# Altium PCB EEG_Electrodes.PcbDoc
Units mil, origin at the board's own origin, x right, y up, seen from the top; angles counter-clockwise.
Board outline 5072.94 x 5237.85 mil, 2 copper layers (Top Layer, Bottom Layer), stack 10.984 mil thick; 57 components, 50 nets, 162 pads, 0 vias.
Unrouted connection lines stored in the file: 96.
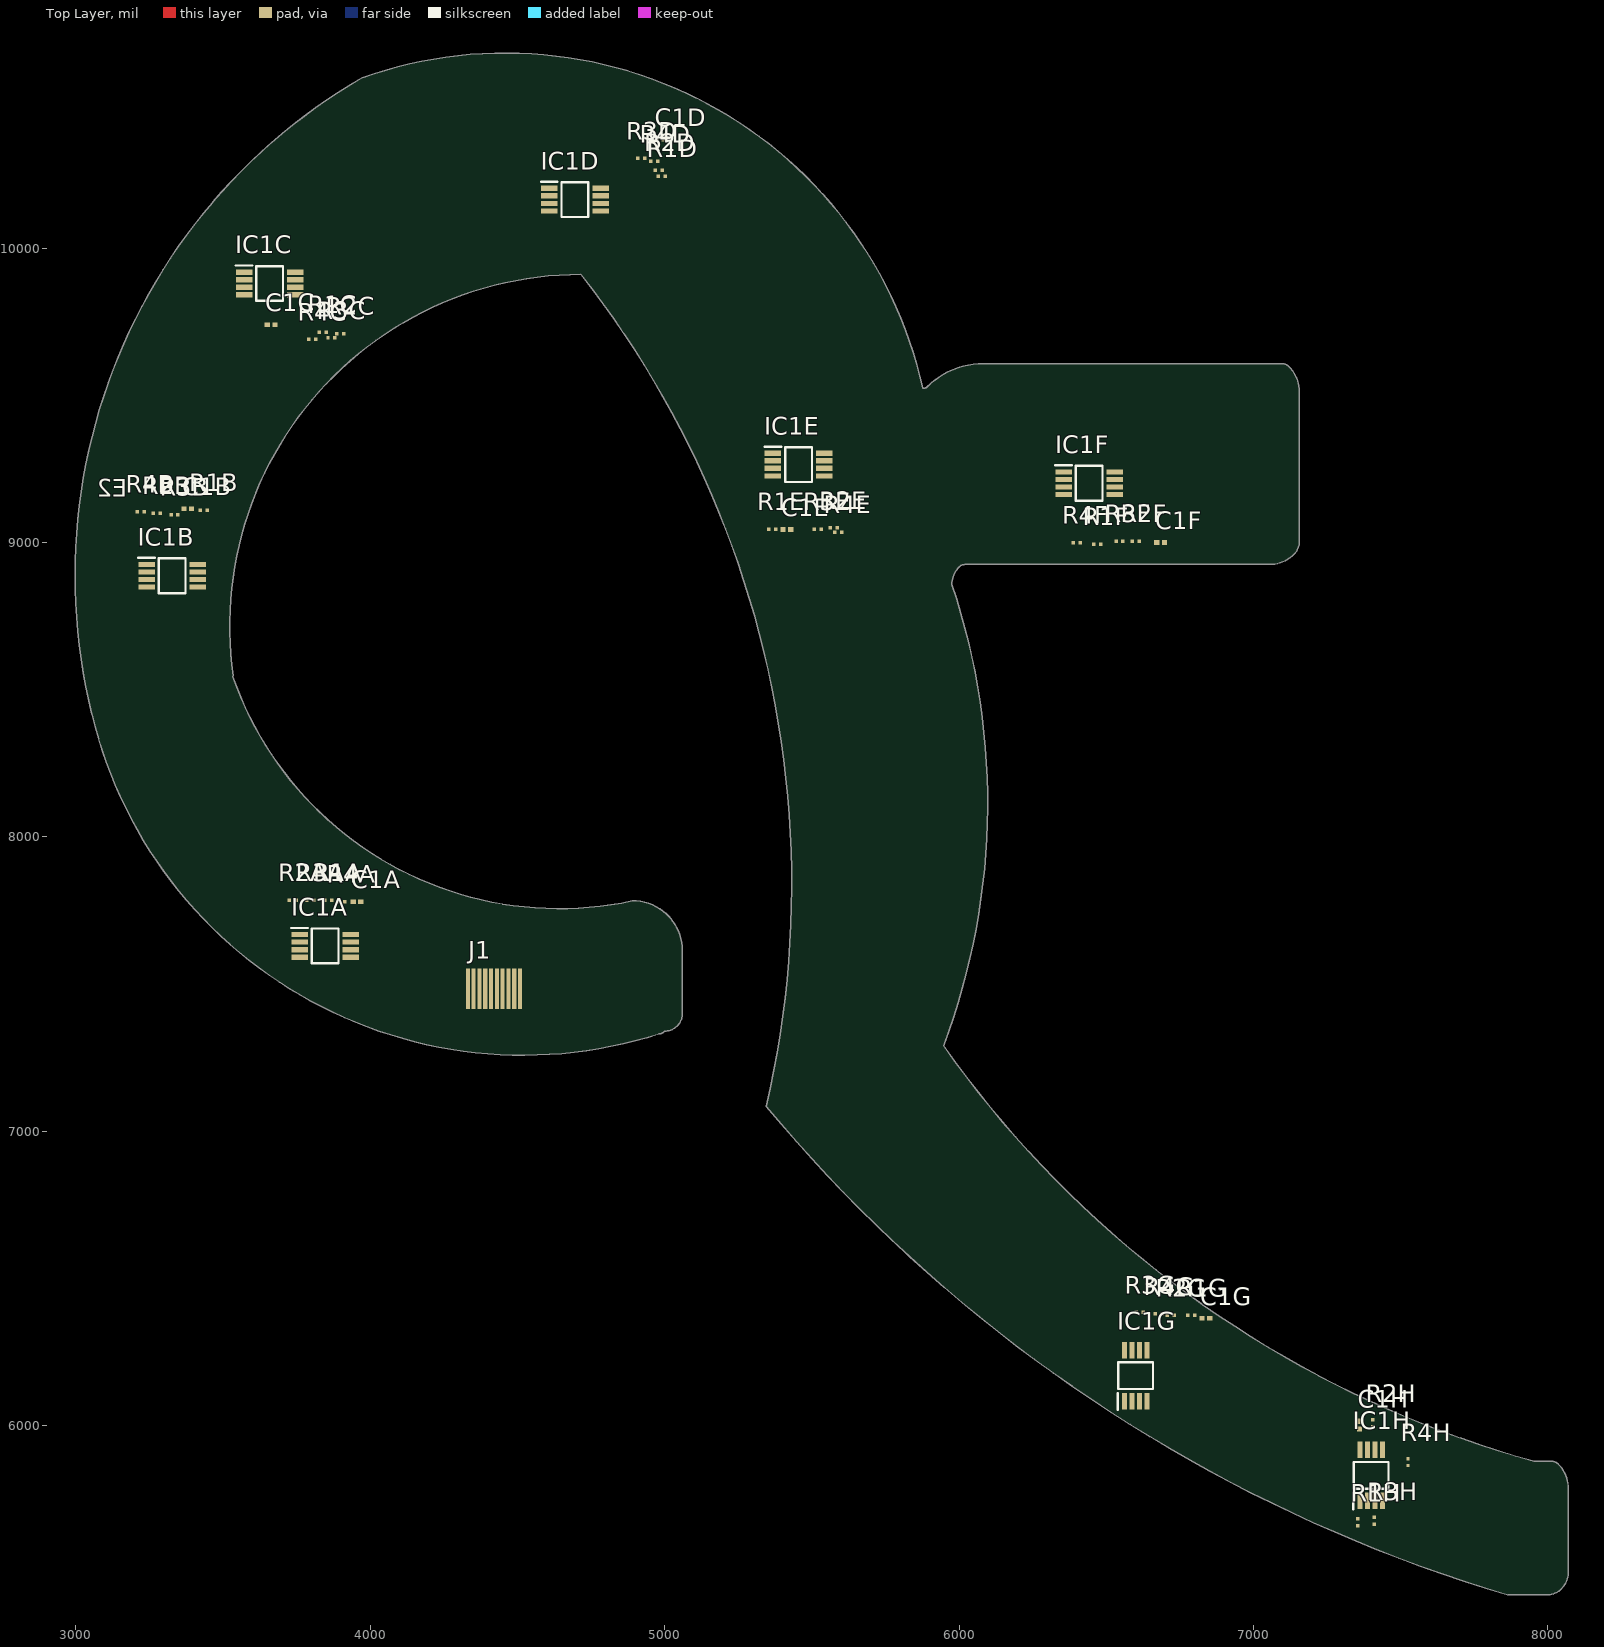
[diagram p0: Top Layer view]
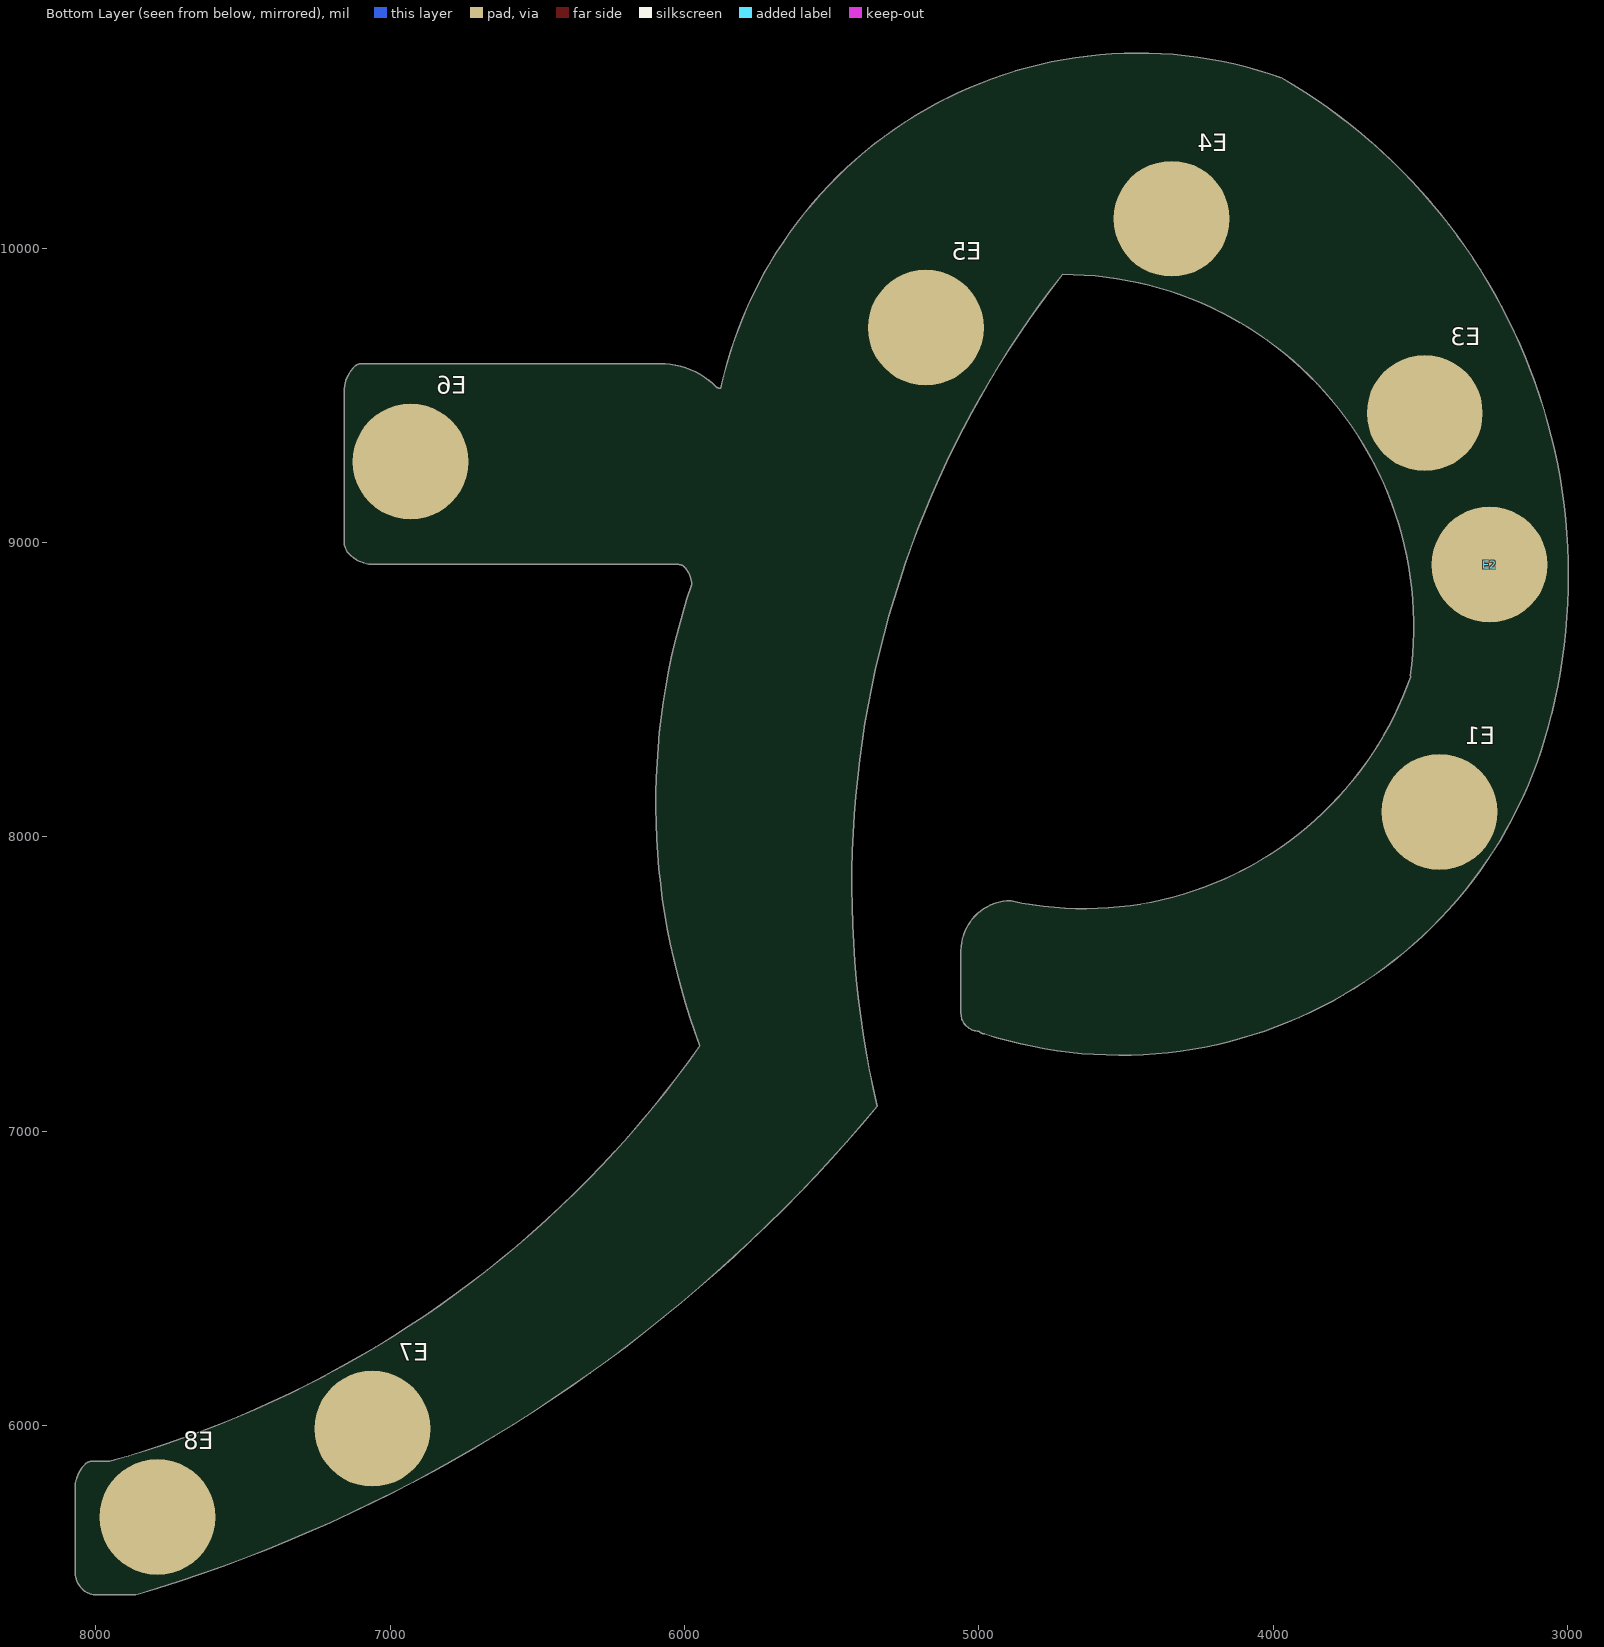
[diagram p1: Bottom Layer view, seen from below]

## Layer stack, top to bottom
Top Stiffener: core 3.937, Core-009, Dk 4.5
Top PI Coverlay: solder mask 0.4921, FC-001, Dk 4
Adhesive 3: prepreg 0.5906, PP-006, Dk 4.1
Top Layer: signal copper 0.4724
Polyimide: core 0.9843, Core-009, Dk 4.5
Bottom Layer: signal copper 0.4724
Adhesive 1: prepreg 0.5906, PP-006, Dk 4.1
Bottom PI Coverlay: solder mask 0.4921, FC-001, Dk 4
Bottom Stifener: core 3.937, Core-009, Dk 4.5

## Board outline
4979.75,7330.78 ccw(c4979.75,7356.18) 4997.71,7338.22 5000,7340.51 ccw(c5000,7401.09) 5060.58,7401.09 5060.58,7613.39 ccw(c4890,7613.39) 4890,7783.97 4890.29,7782.65 cw(c4642.7,8931.44) 3533.11,8544.34 3534.73,8547.8 cw(c4715.58,8717.84) 4715.58,9910.88 cw(c2075.71,7839.18) 5345.48,7084.57 ccw(c9341.39,10408.76) 7864.52,5425.14 7997.05,5425.14 ccw(c7997.05,5492.95) 8045,5445 ccw(c7984.64,5505.36) 8070,5505.36 8070,5785 ccw(c7949.29,5785) 8034.64,5870.36 ccw(c8013.53,5849.24) 8013.53,5879.1 7952.74,5879.1 cw(c8925.5,9391.03) 5947.32,7290.95 ccw(c3760.23,8114.1) 5975.58,8857.84 cw(c6060.08,8857.84) 6000.33,8917.59 cw(c6019.68,8898.24) 6019.68,8925.61 7053.35,8925.61 ccw(c7053.35,9046.32) 7138.7,8960.96 ccw(c7097.95,9001.71) 7155.58,9001.71 7155.58,9512.84 ccw(c7034.87,9512.84) 7120.22,9598.2 ccw(c7096.94,9574.91) 7096.94,9607.84 6083.72,9607.84 ccw(c6083.72,9334.71) 5890.58,9527.84 cw(c5883.2,9535.22) 5883.2,9524.79 5876.79,9524.79 ccw(c4458.79,9210.61) 3973.82,10579.64 ccw(c4950.58,8887.84) 3054.51,8417.6 3055.13,8415.09 ccw(c4519.61,8764.27)

## Design rules (kind name [scope] priority, off if disabled: settings)
BoardOutlineClearance [All] p1: gap=7.87 ignorepadtopadclearanceinfootprint=FALSE
Clearance [All] p1: gap=5 ignorepadtopadclearanceinfootprint=FALSE except(9.84: Arc-Hole Track-Hole SMDPad-Hole THPad-Hole Via-Hole Fill-Hole Poly-Hole Region-Hole Text-Hole)
ComponentClearance [All] p1: gap=5 collisioncheckmode=3 verticalgap=5 showdistances=TRUE
DiffPairsRouting [All] p1: maxlimit=10 minlimit=5 mostfreqgap=5 toplayer_minwidth=5 toplayer_maxwidth=1000 toplayer_prefwidth=5 bottomlayer_minwidth=5 bottomlayer_maxwidth=1000 bottomlayer_prefwidth=5 substack1={4B11E26E-8A27-4325-B018-70703EFA4E52} toplayer_{4b11e26e-8a27-4325-b018-70703efa4e52}_minwidth=15 toplayer_{4b11e26e-8a27-4325-b018-70703efa4e52}_maxwidth=15 toplayer_{4b11e26e-8a27-4325-b018-70703efa4e52}_prefwidth=15 bottomlayer_{4b11e26e-8a27-4325-b018-70703efa4e52}_minwidth=15 bottomlayer_{4b11e26e-8a27-4325-b018-70703efa4e52}_maxwidth=15 bottomlayer_{4b11e26e-8a27-4325-b018-70703efa4e52}_prefwidth=15 substack2={89878998-361B-46A6-8B36-161A69BB316E} toplayer_{89878998-361b-46a6-8b36-161a69bb316e}_minwidth=15 toplayer_{89878998-361b-46a6-8b36-161a69bb316e}_maxwidth=15 toplayer_{89878998-361b-46a6-8b36-161a69bb316e}_prefwidth=15 bottomlayer_{89878998-361b-46a6-8b36-161a69bb316e}_minwidth=15 bottomlayer_{89878998-361b-46a6-8b36-161a69bb316e}_maxwidth=15 bottomlayer_{89878998-361b-46a6-8b36-161a69bb316e}_prefwidth=15 substack3={C0E35EA4-88D3-436C-B866-F59DB42A6E85} toplayer_{c0e35ea4-88d3-436c-b866-f59db42a6e85}_minwidth=15 toplayer_{c0e35ea4-88d3-436c-b866-f59db42a6e85}_maxwidth=15 toplayer_{c0e35ea4-88d3-436c-b866-f59db42a6e85}_prefwidth=15 bottomlayer_{c0e35ea4-88d3-436c-b866-f59db42a6e85}_minwidth=15 bottomlayer_{c0e35ea4-88d3-436c-b866-f59db42a6e85}_maxwidth=15 bottomlayer_{c0e35ea4-88d3-436c-b866-f59db42a6e85}_prefwidth=15 maxuncoupledlength=500
Height [All] p1: minheight=0 maxheight=71497.94 prefheight=500
HoleSize [All] p1: absolutevalues=TRUE maxlimit=248.03 minlimit=11.81 maxpercent=80.000 minpercent=20.000
HoleToHoleClearance [All] p1: gap=9.84 allowstackedmicrovias=FALSE
MinimumAnnularRing [All] p1: minimumring=3
MinimumSolderMaskSliver [All] p1: minsoldermaskwidth=0
PlaneClearance [All] p1: clearance=5
PlaneConnect PlaneConnectPowerPads [InPadClass('PowerPads')] p1: planeconnectstyle=Direct reliefexpansion=20 reliefentries=4 reliefconductorwidth=10 reliefairgap=10
PlaneConnect [All] p2: pad.planeconnectstyle=Relief pad.reliefexpansion=11.81 pad.reliefentries=4 pad.reliefconductorwidth=5 pad.reliefairgap=5 via.planeconnectstyle=Direct via.reliefexpansion=11.81 via.reliefentries=4 via.reliefconductorwidth=5 via.reliefairgap=5
PolygonConnect PolygonConnectPowerPads [All vs (InPadClass('PowerPads'))] p1: connectstyle=Direct reliefconductorwidth=10 reliefentries=4 polygonreliefangle="90 Angle" airgapwidth=10
PolygonConnect [All] p2: thpad.connectstyle=Relief thpad.reliefconductorwidth=5 thpad.reliefentries=4 thpad.polygonreliefangle="90 Angle" thpad.airgapwidth=5 smdpad.connectstyle=Relief smdpad.reliefconductorwidth=5 smdpad.reliefentries=4 smdpad.polygonreliefangle="90 Angle" smdpad.airgapwidth=5 via.connectstyle=Direct via.reliefconductorwidth=5 via.reliefentries=4 via.polygonreliefangle="90 Angle" via.airgapwidth=5
RoomDefinition Designator1 [InComponentClass('Designator1')] p1: confinementstyle=ConfineIn formatcopy=TRUE lockcomponents=FALSE outline 3536.81,7550 3981.81,7550 3981.81,7850 3536.81,7850
RoomDefinition Designator7 [InComponentClass('Designator7')] p2: confinementstyle=ConfineIn formatcopy=TRUE lockcomponents=FALSE outline 6520,6035 7125,6035 7125,6485 6520,6485
RoomDefinition Designator6 [InComponentClass('Designator6')] p3: confinementstyle=ConfineIn formatcopy=TRUE lockcomponents=FALSE outline 6310,8945 7035,8945 7035,9280 6310,9280
RoomDefinition Designator2 [InComponentClass('Designator2')] p4: confinementstyle=ConfineIn formatcopy=TRUE lockcomponents=FALSE outline 3150,8810 3485,8810 3485,9150 3150,9150
RoomDefinition Designator3 [InComponentClass('Designator3')] p5: confinementstyle=ConfineIn formatcopy=TRUE lockcomponents=FALSE outline 3523.19,9615 4058.19,9615 4058.19,9960 3523.19,9960
RoomDefinition Designator4 [InComponentClass('Designator4')] p6: confinementstyle=ConfineIn formatcopy=TRUE lockcomponents=FALSE outline 4560,10085 5040,10085 5040,10395 4560,10395
RoomDefinition Designator5 [InComponentClass('Designator5')] p7: confinementstyle=ConfineIn formatcopy=TRUE lockcomponents=FALSE outline 5295,8995 5640,8995 5640,9345 5295,9345
RoomDefinition Designator8 [InComponentClass('Designator8')] p8: confinementstyle=ConfineIn formatcopy=TRUE lockcomponents=FALSE outline 7311.61,5604.72 7566.61,5604.72 7566.61,6054.72 7311.61,6054.72
RoutingVias [All] p1: holewidth=11.81 width=23.62 viastyle="Through Hole" minholewidth=11.81 minwidth=23.62 maxholewidth=23.62 maxwidth=259.84
SilkToSilkClearance [All] p1: silktosilkclearance=0
SilkToSolderMaskClearance [IsPad] p1: minsilkscreentomaskgap=5 clearancetoexposedcopper=TRUE
SolderMaskExpansion [All] p1: expansion=2.95 istentingtop=FALSE
SupplyNets "Schematic Supply Nets_1" [InNet('VCC')] p1: voltage=0.000
SupplyNets "Schematic Supply Nets" [InNet('GND')] p2: voltage=0.000
Width [All] p1: maxlimit=1000 minlimit=5 preferedwidth=5 substack1={4B11E26E-8A27-4325-B018-70703EFA4E52} substack2={89878998-361B-46A6-8B36-161A69BB316E} substack3={C0E35EA4-88D3-436C-B866-F59DB42A6E85} minimp=50.000000 maximp=50.000000 favimp=50.000000
20 further rules are at their usual default settings.

## Classes and differential pairs
channel class Electrode: Designator1 Designator2 Designator3 Designator4 Designator5 Designator6 Designator7 Designator8
component class Designator8: C1H IC1H R1H R2H R3H R4H
component class Designator7: C1G IC1G R1G R2G R3G R4G
component class Designator6: C1F IC1F R1F R2F R3F R4F
component class Designator5: C1E IC1E R1E R2E R3E R4E
component class Designator4: C1D IC1D R1D R2D R3D R4D
component class Designator3: C1C IC1C R1C R2C R3C R4C
component class Designator2: C1B IC1B R1B R2B R3B R4B
component class Designator1: C1A IC1A R1A R2A R3A R4A
component class EEG_Electrodes: E1 E2 E3 E4 E5 E6 E7 E8 J1

## Components (designator, comment, footprint, x,y, rotation, side; value= is the part's Value field where it differs from the comment)
C1A "GRM033R6YA104KE14D" CAPC0603X33N 3954.8,7780 r0 top (schematic designator C1)
C1B "GRM033R6YA104KE14D" CAPC0603X33N 3380,9115 r0 top (schematic designator C1)
C1C "GRM033R6YA104KE14D" CAPC0603X33N 3663.19,9740 r0 top (schematic designator C1)
C1D "GRM033R6YA104KE14D" CAPC0603X33N 4985,10370 r0 top (schematic designator C1)
C1E "GRM033R6YA104KE14D" CAPC0603X33N 5415,9045 r0 top (schematic designator C1)
C1F "GRM033R6YA104KE14D" CAPC0603X33N 6685,9000 r0 top (schematic designator C1)
C1G "GRM033R6YA104KE14D" CAPC0603X33N 6838.46,6365 r0 top (schematic designator C1)
C1H "GRM033R6YA104KE14D" CAPC0603X33N 7360,6001.81 r90 top (schematic designator C1)
E1 "EEG_Electrode" EEG_Electrode#1 3435,8085 r0 top
E2 "EEG_Electrode" EEG_Electrode#2 3265,8925 r180 bottom
E3 "EEG_Electrode" EEG_Electrode#1 3485,9440 r0 top
E4 "EEG_Electrode" EEG_Electrode#1 4345,10100 r0 top
E5 "EEG_Electrode" EEG_Electrode#1 5180,9730 r0 top
E6 "EEG_Electrode" EEG_Electrode#1 6930,9275 r0 top
E7 "EEG_Electrode" EEG_Electrode#1 7060,5990 r0 top
E8 "EEG_Electrode" EEG_Electrode#1 7790,5690 r0 top
IC1A "LTC6078ACMS8#TRPBF" SOP65P490X110-8N 3846.81,7630 r0 top (schematic designator IC1)
IC1B "LTC6078ACMS8#TRPBF" SOP65P490X110-8N 3327.09,8887.2 r0 top (schematic designator IC1)
IC1C "LTC6078ACMS8#TRPBF" SOP65P490X110-8N 3658.19,9880 r0 top (schematic designator IC1)
IC1D "LTC6078ACMS8#TRPBF" SOP65P490X110-8N 4695,10165 r0 top (schematic designator IC1)
IC1E "LTC6078ACMS8#TRPBF" SOP65P490X110-8N 5455,9265 r0 top (schematic designator IC1)
IC1F "LTC6078ACMS8#TRPBF" SOP65P490X110-8N 6442.09,9201.61 r0 top (schematic designator IC1)
IC1G "LTC6078ACMS8#TRPBF" SOP65P490X110-8N 6600,6170 r90 top (schematic designator IC1)
IC1H "LTC6078ACMS8#TRPBF" SOP65P490X110-8N 7400,5831.81 r90 top (schematic designator IC1)
J1 "10FHH-SM1-GAN-TF FPC" "10FHH-SM1-GAN-TF FPC" 4331.57,7416.1 r0 top
R1A "ERA-1AEB101C" ERA1A_(0201) 3856.81,7785 r0 top (schematic designator R1)
R1B "ERA-1AEB101C" ERA1A_(0201) 3435,9110 r0 top (schematic designator R1)
R1C "ERA-1AEB101C" ERA1A_(0201) 3838.19,9715 r0 top (schematic designator R1)
R1D "ERA-1AEB101C" ERA1A_(0201) 4990,10245 r0 top (schematic designator R1)
R1E "ERA-1AEB101C" ERA1A_(0201) 5365,9045 r0 top (schematic designator R1)
R1F "ERA-1AEB101C" ERA1A_(0201) 6470,8995 r0 top (schematic designator R1)
R1G "ERA-1AEB101C" ERA1A_(0201) 6788.46,6375 r0 top (schematic designator R1)
R1H "ERA-1AEB101C" ERA1A_(0201) 7355,5671.81 r90 top (schematic designator R1)
R2A "ERA-1AEB101C" ERA1A_(0201) 3736.81,7785 r0 top (schematic designator R2)
R2B "ERA-1AEB101C" ERA1A_(0201) 3275,9100 r0 top (schematic designator R2)
R2C "ERA-1AEB101C" ERA1A_(0201) 3898.19,9710 r0 top (schematic designator R2)
R2D "ERA-1AEB101C" ERA1A_(0201) 4980,10265 r0 top (schematic designator R2)
R2E "ERA-1AEB101C" ERA1A_(0201) 5575,9050 r0 top (schematic designator R2)
R2F "ERA-1AEB101C" ERA1A_(0201) 6600,9005 r0 top (schematic designator R2)
R2G "ERA-1AEB101C" ERA1A_(0201) 6718.46,6375 r0 top (schematic designator R2)
R2H "ERA-1AEB101C" ERA1A_(0201) 7405,6008.62 r90 top (schematic designator R2)
R3A "AF0201JR-0768KL" ERA1A_(0201) 3796.81,7785 r0 top (schematic designator R3)
R3B "AF0201JR-0768KL" ERA1A_(0201) 3335,9095 r0 top (schematic designator R3)
R3C "AF0201JR-0768KL" ERA1A_(0201) 3868.19,9695 r0 top (schematic designator R3)
R3D "AF0201JR-0768KL" ERA1A_(0201) 4920,10305 r0 top (schematic designator R3)
R3E "AF0201JR-0768KL" ERA1A_(0201) 5520,9045 r0 top (schematic designator R3)
R3F "AF0201JR-0768KL" ERA1A_(0201) 6545,9005 r0 top (schematic designator R3)
R3G "AF0201JR-0768KL" ERA1A_(0201) 6613.46,6385 r0 top (schematic designator R3)
R3H "AF0201JR-0768KL" ERA1A_(0201) 7410,5676.81 r90 top (schematic designator R3)
R4A "AF0201JR-071ML" ERA1A_(0201) 3901.81,7780 r0 top (schematic designator R4)
R4B "AF0201JR-071ML" ERA1A_(0201) 3220,9105 r0 top (schematic designator R4)
R4C "AF0201JR-071ML" ERA1A_(0201) 3803.19,9690 r0 top (schematic designator R4)
R4D "AF0201JR-071ML" ERA1A_(0201) 4965,10295 r0 top (schematic designator R4)
R4E "AF0201JR-071ML" ERA1A_(0201) 5590,9035 r0 top (schematic designator R4)
R4F "AF0201JR-071ML" ERA1A_(0201) 6400,9000 r0 top (schematic designator R4)
R4G "AF0201JR-071ML" ERA1A_(0201) 6678.46,6380 r0 top (schematic designator R4)
R4H "AF0201JR-071ML" ERA1A_(0201) 7525,5876.81 r90 top (schematic designator R4)

## Footprints (in the part's own frame and the unit in brackets; to place one, negate y for a bottom-side part, rotate by r counter-clockwise, add the part's x,y. Pads: shape width x height; smd on the part's side, far side on the other; paste and mask are expansions set on the pad)
"10FHH-SM1-GAN-TF FPC" [mm] "FPC side of 10FHH-SM1-GAN-TF"
  rect 0.35x3.5 smd: 1(0,1.75) 2(0.5,1.75) 3(1,1.75) 4(1.5,1.75) 5(2,1.75) 6(2.5,1.75) 7(3,1.75) 8(3.5,1.75) 9(4,1.75) 10(4.5,1.75)
CAPC0603X33N [mm]
  rect 0.46x0.42 smd: 1(-0.33,0) 2(0.33,0)
  body extent -0.3,-0.15 0.3,0.15, height 0.33
EEG_Electrode#1 [mm] "EEG Electrode ENIG Pad"
  round 10 smd far side paste-10: 1(0,0)
EEG_Electrode#2 [mm] "EEG Electrode ENIG Pad"
  round 10 smd paste-10: 1(0,0)
ERA1A_(0201) [mm]
  rect 0.3x0.3 smd: 1(-0.3,0) 2(0.3,0)
  body extent -0.3,-0.15 0.3,0.15, height 0.23
SOP65P490X110-8N [mm]
  rect 1.425x0.45 smd: 1(-2.212,0.975) 2(-2.212,0.325) 3(-2.212,-0.325) 4(-2.212,-0.975) 5(2.212,-0.975) 6(2.212,-0.325) 7(2.212,0.325) 8(2.212,0.975)
  silkscreen extent -2.93,-1.5 1.15,1.55, body extent -2.45,-1.5 2.45,1.5, height 1

## Part data
C1A C1B C1C C1D C1E C1F C1G C1H: "Capacitor", Manufacturer_Name="Murata Electronics", Mouser Part Number=81-GRM33R6YA104KE14D, Arrow Part Number=GRM033R6YA104KE14D, Arrow Price/Stock=https://www.arrow.com/en/products/grm033r6ya104ke14d/murata-manufacturing?utm_currency=USD&region=europe, Datasheet Link=https://search.murata.co.jp/Ceramy/image/img/A01X/G101/ENG/GRM033R6YA104KE14-01A.pdf, Height=0.33mm, Manufacturer_Part_Number=GRM033R6YA104KE14D, Mouser Price/Stock=https://www.mouser.co.uk/ProductDetail/Murata-Electronics/GRM033R6YA104KE14D?qs=P%2FC4Eoq9CDwTt3wOuyKhXw%3D%3D
IC1A IC1B IC1C IC1D IC1E IC1F IC1G IC1H: "Integrated Circuit", Manufacturer_Name="Analog Devices", Mouser Part Number=584-C6078ACMS8TRPBF, Arrow Part Number=LTC6078ACMS8#TRPBF, Arrow Price/Stock=https://www.arrow.com/en/products/ltc6078acms8trpbf/analog-devices?region=nac, Datasheet Link=https://datasheet.datasheetarchive.com/originals/distributors/Datasheets_SAMA/f60955edb7006695a84935bb44c6cde2.pdf, Height=1.1mm, Manufacturer_Part_Number=LTC6078ACMS8#TRPBF, Mouser Price/Stock=https://www.mouser.com/Search/Refine.aspx?Keyword=584-C6078ACMS8TRPBF
R1A R1B R1C R1D R1E R1F R1G R1H R2A R2B R2C R2D R2E R2F R2G R2H: "Resistor 100 ohms", Manufacturer_Name=Panasonic, Mouser Part Number=667-ERA-1AEB101C, Arrow Part Number=ERA-1AEB101C, Arrow Price/Stock=https://www.arrow.com/en/products/era-1aeb101c/panasonic?region=nac, Datasheet Link=http://industrial.panasonic.com/cdbs/www-data/pdf/RDM0000/AOA0000C307.pdf, Height=0.26mm, Manufacturer_Part_Number=ERA-1AEB101C, Mouser Price/Stock=https://www.mouser.co.uk/ProductDetail/Panasonic/ERA-1AEB101C?qs=6%252Bc%252B2ke79U4NC8Nf%252Bq1i6A%3D%3D
R3A R3B R3C R3D R3E R3F R3G R3H: library part ERA-1AEB101C, "Resistor 68k", Manufacturer_Name=Panasonic, Mouser Part Number=667-ERA-1AEB101C, Arrow Part Number=ERA-1AEB101C, Arrow Price/Stock=https://www.arrow.com/en/products/era-1aeb101c/panasonic?region=nac, Datasheet Link=http://industrial.panasonic.com/cdbs/www-data/pdf/RDM0000/AOA0000C307.pdf, Height=0.26mm, Manufacturer_Part_Number=ERA-1AEB101C, Mouser Price/Stock=https://www.mouser.co.uk/ProductDetail/Panasonic/ERA-1AEB101C?qs=6%252Bc%252B2ke79U4NC8Nf%252Bq1i6A%3D%3D
R4A R4B R4C R4D R4E R4F R4G R4H: library part ERA-1AEB101C, "Resistor 1M", Manufacturer_Name=Panasonic, Mouser Part Number=667-ERA-1AEB101C, Arrow Part Number=ERA-1AEB101C, Arrow Price/Stock=https://www.arrow.com/en/products/era-1aeb101c/panasonic?region=nac, Datasheet Link=http://industrial.panasonic.com/cdbs/www-data/pdf/RDM0000/AOA0000C307.pdf, Height=0.26mm, Manufacturer_Part_Number=ERA-1AEB101C, Mouser Price/Stock=https://www.mouser.co.uk/ProductDetail/Panasonic/ERA-1AEB101C?qs=6%252Bc%252B2ke79U4NC8Nf%252Bq1i6A%3D%3D

## Nets (pads, with @x,y where several pads share a name; then routed paths per layer and width w, separated by ;. In a path a pad name is that pad's centre, name@x,y a point inside that pad or via, vN(x,y) a via of type N, cw(c..) or ccw(c..) an arc to the next point about the centre after c; other vN are vias at no path point)
GND: C1A.2 C1B.2 C1C.2 C1D.2 C1E.2 C1F.2 C1G.2 C1H.2 IC1A.4 IC1B.4 IC1C.4 IC1D.4 IC1E.4 IC1F.4 IC1G.4 IC1H.4 J1.10
GUARD_RING1A: R2A.2
GUARD_RING1B: R2B.2
GUARD_RING1C: R2C.2
GUARD_RING1D: R2D.2
GUARD_RING1E: R2E.2
GUARD_RING1F: R2F.2
GUARD_RING1G: R2G.2
GUARD_RING1H: R2H.2
INT1A: IC1A.1 IC1A.2 IC1A.5 R1A.2
INT1B: IC1B.1 IC1B.2 IC1B.5 R1B.2
INT1C: IC1C.1 IC1C.2 IC1C.5 R1C.2
INT1D: IC1D.1 IC1D.2 IC1D.5 R1D.2
INT1E: IC1E.1 IC1E.2 IC1E.5 R1E.2
INT1F: IC1F.1 IC1F.2 IC1F.5 R1F.2
INT1G: IC1G.1 IC1G.2 IC1G.5 R1G.2
INT1H: IC1H.1 IC1H.2 IC1H.5 R1H.2
NetE1_1: E1.1 R3A.1
NetE2_1: E2.1 R3B.1
NetE3_1: E3.1 R3C.1
NetE4_1: E4.1 R3D.1
NetE5_1: E5.1 R3E.1
NetE6_1: E6.1 R3F.1
NetE7_1: E7.1 R3H.1
NetE8_1: E8.1 R3G.1
NetIC1A_3: IC1A.3 R3A.2
NetIC1A_6: IC1A.6 IC1A.7 R2A.1
NetIC1B_3: IC1B.3 R3B.2
NetIC1B_6: IC1B.6 IC1B.7 R2B.1
NetIC1C_3: IC1C.3 R3C.2
NetIC1C_6: IC1C.6 IC1C.7 R2C.1
NetIC1D_3: IC1D.3 R3D.2
NetIC1D_6: IC1D.6 IC1D.7 R2D.1
NetIC1E_3: IC1E.3 R3E.2
NetIC1E_6: IC1E.6 IC1E.7 R2E.1
NetIC1F_3: IC1F.3 R3F.2
NetIC1F_6: IC1F.6 IC1F.7 R2F.1
NetIC1G_3: IC1G.3 R3G.2
NetIC1G_6: IC1G.6 IC1G.7 R2G.1
NetIC1H_3: IC1H.3 R3H.2
NetIC1H_6: IC1H.6 IC1H.7 R2H.1
Pad1: J1.1 R1A.1
Pad2: J1.2 R1B.1
Pad3: J1.3 R1C.1
Pad4: J1.4 R1D.1
Pad5: J1.5 R1E.1
Pad6: J1.6 R1F.1
Pad7: J1.7 R1H.1
Pad8: J1.8 R1G.1
VCC: C1A.1 C1B.1 C1C.1 C1D.1 C1E.1 C1F.1 C1G.1 C1H.1 IC1A.8 IC1B.8 IC1C.8 IC1D.8 IC1E.8 IC1F.8 IC1G.8 IC1H.8 J1.9
pads on no net: R4A.1 R4A.2 R4B.1 R4B.2 R4C.1 R4C.2 R4D.1 R4D.2 R4E.1 R4E.2 R4F.1 R4F.2 R4G.1 R4G.2 R4H.1 R4H.2

## Polygon pours and split planes (outlines as drawn)
no net on Layer0 "Default Coverlay 4 Top" (split plane): 351 vertices, not listed, extent 2996.67,5425.14 8070,10663.29
no net on Layer0 "Default Coverlay 4 Bottom" (split plane): 351 vertices, not listed, extent 2996.67,5425.14 8070,10663.29
no net on Layer0 "Default Coverlay 3 Top" (split plane): 351 vertices, not listed, extent 2996.67,5425.14 8070,10663.29
no net on Layer0 "Default Coverlay 3 Bottom" (split plane): 351 vertices, not listed, extent 2996.67,5425.14 8070,10663.29

## Silkscreen, mask and mechanical layers (free items; w line width, h text height)
Mechanical 1:
  lines w1: 2739.5,9601.5 cw(c2735.5,9601.5) 2731.5,9601.5 cw(c2731.5,9611) 2722,9611 2722,9621 ccw(c2712.5,9621) 2712.5,9630.5 2688.5,9630.5 ccw(c2688.5,9621) 2679,9621 2679,9611 cw(c2669.5,9611) 2669.5,9601.5 2626.5,9601.5 ccw(c2626.5,9592.5) 2617.5,9592.5 2617.5,9394.5 ccw(c2627,9394.5) 2627,9385 2669,9385 cw(c2669,9375.5) 2678.5,9375.5 2678.5,9365.5 ccw(c2688,9365.5) 2688,9356 2712,9356 ccw(c2712,9365.5) 2721.5,9365.5 2721.5,9375.5 cw(c2731,9375.5) 2731,9385 cw(c2735,9385) 2739,9385 ccw(c2743.83,9389.83) 2743.83,9383 2878,9383 3061,9383 ; 2739.63,9601.4 ccw(c2743.01,9604.78) 2743.01,9600 2878,9600 3126.46,9600 ccw(c3126.46,9608.54) 3132.5,9602.5 ; 2877,9384 2877.29,9383.71 ccw(c2879,9385.41) 2879,9383 ; 3054.51,8417.6 cw(c4950.58,8887.84) 3060.87,9383.03 ; 3055.85,8417.78 ccw(c3056.75,8416.23) 3055.01,8415.8 3055.13,8415.09 ; 3132.38,9602.24 cw(c4950.58,8887.84) 3973.82,10579.64 ; 3055.13,8415.09 ccw(c4519.61,8764.27) 4979.75,7330.78 ; 3055.13,8415.09 ccw(c4519.61,8764.27) 4979.75,7330.78 ; 3533.11,8544.34 ccw(c4642.7,8931.44) 4890.29,7782.65 ; 3533.11,8544.34 ccw(c4642.7,8931.44) 4890.29,7782.65 ; 3533.11,8544.34 3534.73,8547.8 ; 3534.73,8547.8 cw(c4715.58,8717.84) 4715.58,9910.88 ; 3534.73,8547.8 cw(c4715.58,8717.84) 4715.58,9910.88 ; 3973.82,10579.64 cw(c4458.79,9210.61) 5876.79,9524.79 ; 3973.82,10579.64 cw(c4458.79,9210.61) 5876.79,9524.79 ; 4715.58,9910.88 cw(c2075.71,7839.18) 5345.48,7084.57 ; 4715.58,9910.88 cw(c2075.71,7839.18) 5345.48,7084.57 ; 4890,7783.97 cw(c4890,7613.39) 5060.58,7613.39 ; 4890,7783.97 cw(c4890,7613.39) 5060.58,7613.39 ; 4890,7783.97 4890.29,7782.65 ; 4979.75,7330.78 ccw(c4979.75,7356.18) 4997.71,7338.22 ; 4979.75,7330.78 ccw(c4979.75,7356.18) 4997.71,7338.22 ; 4997.71,7338.22 5000,7340.51 ; 5000,7340.51 ccw(c5000,7401.09) 5060.58,7401.09 ; 5000,7340.51 ccw(c5000,7401.09) 5060.58,7401.09 ; 5060.58,7401.09 5060.58,7613.39 ; 5060.58,7401.09 5060.58,7613.39 ; 5345.48,7084.57 ccw(c9341.39,10408.76) 7864.52,5425.14 ; 5345.48,7084.57 ccw(c9341.39,10408.76) 7864.52,5425.14 ; 5876.79,9524.79 5883.2,9524.79 ; 5876.79,9524.79 5883.2,9524.79 ; 5883.2,9524.79 ccw(c5883.2,9535.22) 5890.58,9527.84 ; 5883.2,9524.79 ccw(c5883.2,9535.22) 5890.58,9527.84 ; 5890.58,9527.84 cw(c6083.72,9334.71) 6083.72,9607.84 ; 5890.58,9527.84 cw(c6083.72,9334.71) 6083.72,9607.84 ; 5947.32,7290.95 ccw(c3760.23,8114.1) 5975.58,8857.84 ; 5947.32,7290.95 ccw(c8925.5,9391.03) 7952.74,5879.1 ; 5947.32,7290.95 ccw(c8925.5,9391.03) 7952.74,5879.1 ; 5947.32,7290.95 ccw(c3760.23,8114.1) 5975.58,8857.84 ; 5975.58,8857.84 cw(c6060.08,8857.84) 6000.33,8917.59 ; 5975.58,8857.84 cw(c6060.08,8857.84) 6000.33,8917.59 ; 6000.33,8917.59 cw(c6019.68,8898.24) 6019.68,8925.61 ; 6000.33,8917.59 cw(c6019.68,8898.24) 6019.68,8925.61 ; 6019.68,8925.61 7053.35,8925.61 ; 6019.68,8925.61 6134.94,8925.61 7053.35,8925.61 ; 6083.72,9607.84 7096.94,9607.84 ; 6083.72,9607.84 7096.94,9607.84 ; 7053.35,8925.61 ccw(c7053.35,9046.32) 7138.7,8960.96 ; 7053.35,8925.61 ccw(c7053.35,9046.32) 7138.7,8960.96 ; 7096.94,9607.84 cw(c7096.94,9574.91) 7120.22,9598.2 ; 7096.94,9607.84 cw(c7096.94,9574.91) 7120.22,9598.2 ; 7120.22,9598.2 cw(c7034.87,9512.84) 7155.58,9512.84 ; 7120.22,9598.2 cw(c7034.87,9512.84) 7155.58,9512.84 ; 7138.7,8960.96 ccw(c7097.95,9001.71) 7155.58,9001.71 ; 7138.7,8960.96 ccw(c7097.95,9001.71) 7155.58,9001.71 ; 7155.58,9001.71 7155.58,9512.84 ; 7155.58,9001.71 7155.58,9512.84 ; 7864.52,5425.14 7997.05,5425.14 ; 7864.52,5425.14 7997.05,5425.14 ; 7952.74,5879.1 8013.53,5879.1 ; 7952.74,5879.1 8013.53,5879.1 ; 7997.05,5425.14 ccw(c7997.05,5492.95) 8045,5445 ; 7997.05,5425.14 ccw(c7997.05,5492.95) 8045,5445 ; 8013.53,5879.1 cw(c8013.53,5849.24) 8034.64,5870.36 ; 8013.53,5879.1 cw(c8013.53,5849.24) 8034.64,5870.36 ; 8034.64,5870.36 cw(c7949.29,5785) 8070,5785 ; 8034.64,5870.36 cw(c7949.29,5785) 8070,5785 ; 8045,5445 ccw(c7984.64,5505.36) 8070,5505.36 ; 8045,5445 ccw(c7984.64,5505.36) 8070,5505.36 ; 8070,5505.36 8070,5785 ; 8070,5505.36 8070,5785